# Altium PCB board.PcbDoc
Units mil, origin at the board's own origin, x right, y up, seen from the top; angles counter-clockwise.
Board outline 2160 x 2940 mil, 4 copper layers (Top Layer, GND, PWR, Bottom Layer), stack 64.008 mil thick; 87 components, 61 nets, 299 pads, 4 vias.
Unrouted connection lines stored in the file: 184.
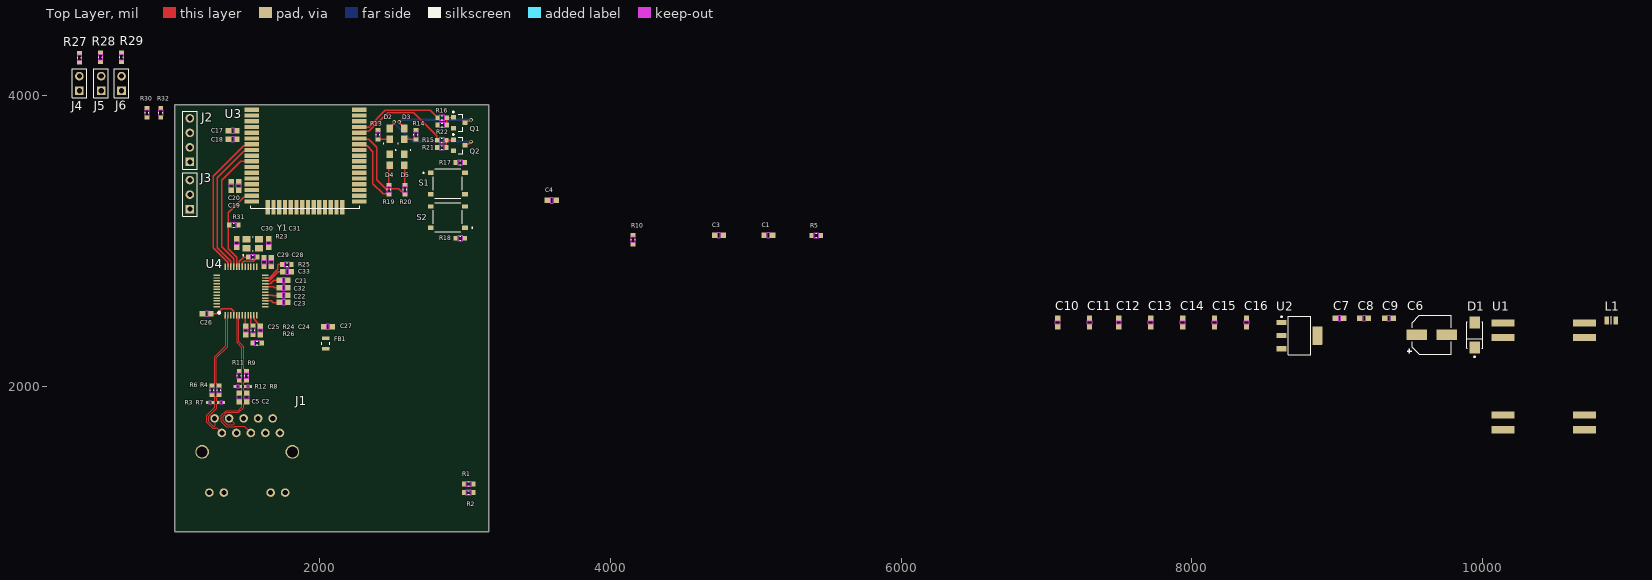
[diagram p0: Top Layer view]
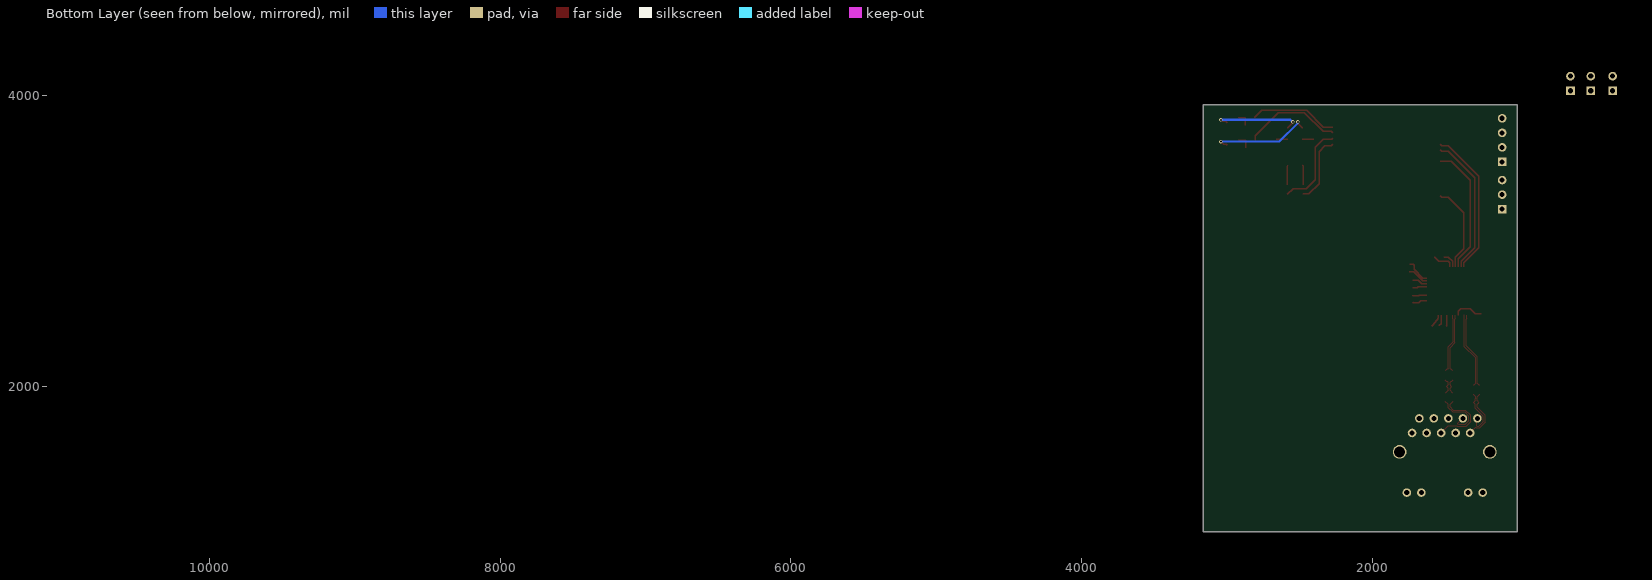
[diagram p1: Bottom Layer view, seen from below]

## Layer stack, top to bottom
Top Solder: solder mask 0.4, Solder Resist, Dk 3.8
Top Layer: signal copper 1.378
Dielectric 2: prepreg 8.2835, PP-006, Dk 4.1
GND: signal copper 1.378
Dielectric 1: dielectric 41.9291, FR-4, Dk 4.8
PWR: signal copper 1.378
Dielectric 3: prepreg 8.2835, PP-006, Dk 4.1
Bottom Layer: signal copper 1.378
Bottom Solder: solder mask 0.4, Solder Resist, Dk 3.8

## Board outline
1000,1000 3160,1000 3160,3940 1000,3940

## Design rules (kind name [scope] priority, off if disabled: settings)
Clearance [All] p1: gap=10 ignorepadtopadclearanceinfootprint=FALSE except(0: Arc-Hole Track-Hole SMDPad-Hole THPad-Hole Via-Hole Fill-Hole Poly-Hole Region-Hole Text-Hole; 5: Arc-Arc Arc-Track Track-Track SMDPad-SMDPad; 7.87: Arc-SMDPad Track-SMDPad SMDPad-Fill SMDPad-Poly SMDPad-Region)
DiffPairsRouting Ethernet [InDifferentialPairClass('Ethernet')] p1: maxlimit=10 minlimit=6 mostfreqgap=6 toplayer_minwidth=7.07 toplayer_maxwidth=7.07 toplayer_prefwidth=7.07 midlayer1_minwidth=7.07 midlayer1_maxwidth=7.07 midlayer1_prefwidth=7.07 midlayer2_minwidth=7.07 midlayer2_maxwidth=7.07 midlayer2_prefwidth=7.07 bottomlayer_minwidth=7.07 bottomlayer_maxwidth=7.07 bottomlayer_prefwidth=7.07 maxuncoupledlength=500
DiffPairsRouting [All] p2: maxlimit=10 minlimit=10 mostfreqgap=10 toplayer_minwidth=8 toplayer_maxwidth=15 toplayer_prefwidth=15 midlayer1_minwidth=8 midlayer1_maxwidth=15 midlayer1_prefwidth=15 midlayer2_minwidth=8 midlayer2_maxwidth=15 midlayer2_prefwidth=15 bottomlayer_minwidth=8 bottomlayer_maxwidth=15 bottomlayer_prefwidth=15 maxuncoupledlength=500
PolygonConnect [All] p1: connectstyle=Relief reliefconductorwidth=10 reliefentries=4 polygonreliefangle="90 Angle" airgapwidth=10
RoomDefinition U_ethernet_PoE [InComponentClass('U_ethernet_PoE')] p1: confinementstyle=ConfineIn formatcopy=TRUE lockcomponents=FALSE outline 7045,1630 10950,1630 10950,2600 7045,2600
RoutingVias [All] p1: holewidth=19.68 width=39.37 viastyle="Through Hole" minholewidth=7.87 minwidth=23.62 maxholewidth=28 maxwidth=50
SilkToSolderMaskClearance [IsPad] p1: minsilkscreentomaskgap=5.91 clearancetoexposedcopper=TRUE
SolderMaskExpansion [All] p1: expansion=4 istentingtop=FALSE
Width [All] p1: maxlimit=15 minlimit=4 preferedwidth=10 midlayer1_minwidth=10 midlayer1_maxwidth=10 midlayer2_minwidth=10 midlayer2_maxwidth=10 minimp=50.000000 maximp=50.000000 favimp=50.000000
28 further rules are at their usual default settings.

## Classes and differential pairs
differential pair class Ethernet: __RD RD RX TD TX
component class U_uwb_module: 40 C17 C18 C19 C20 D2 D3 D4 D5 Q1 Q2 R13 R14 R15 R16 R17 R18 R19 R20 R21 R22 S1 S2 U3
component class U_ethernet_W5500: C21 C22 C23 C24 C25 C26 C27 C28 C29 C30 C31 C32 C33 FB1 J4 J5 J6 R23 R24 R25 R26 R27 R28 R29 R30 R31 R32 U4 Y1
component class U_ethernet_RJ45: C1 C2 C3 C4 C5 J1 R1 R2 R3 R4 R5 R6 R7 R8 R9 R10 R11 R12
component class U_ethernet_PoE: C6 C7 C8 C9 C10 C11 C12 C13 C14 C15 C16 D1 L1 U1 U2
component class main: J2 J3
differential pair TX: +TX_P -TX_N
differential pair TD: +TD_P -TD_N
differential pair RX: +RX_P -RX_N
differential pair RD: +RD_P -RD_N
differential pair __RD: +__RD_P -__RD_N

## Components (designator, comment, footprint, x,y, rotation, side; value= is the part's Value field where it differs from the comment)
C1 "Capacitor - Nonpolarized" "0603 - Capacitor" 5085,3040 r0 top value=22nF
C2 "Capacitor - Nonpolarized" "0603 - Capacitor" 1495,1924.84 r270 top value=6.8nF
C3 "Capacitor - Nonpolarized" "0603 - Capacitor" 4745,3040 r0 top value=1nF/2kV
C4 "Capacitor - Nonpolarized" "0603 - Capacitor" 3595,3280 r0 top value=10nF
C5 "Capacitor - Nonpolarized" "0603 - Capacitor" 1445,1924.84 r270 top value=6.8nF
C6 "Capacitor - Polarized" "OCVZ0606 - CAPACITOR" 9650,2355 r0 top value=100uF
C7 "Capacitor - Nonpolarized" "0603 - Capacitor" 9015,2470 r0 top value=10uF
C8 "Capacitor - Nonpolarized" "0603 - Capacitor" 9185,2470 r0 top value=10uF
C9 "Capacitor - Nonpolarized" "0603 - Capacitor" 9355,2470 r0 top value=10uF
C10 "Capacitor - Nonpolarized" "0603 - Capacitor" 7075,2440 r90 top value=0.1uF
C11 "Capacitor - Nonpolarized" "0603 - Capacitor" 7295,2440 r90 top value=DNP
C12 "Capacitor - Nonpolarized" "0603 - Capacitor" 7495,2440 r90 top value=0.1uF
C13 "Capacitor - Nonpolarized" "0603 - Capacitor" 7715,2440 r90 top value=1uF
C14 "Capacitor - Nonpolarized" "0603 - Capacitor" 7935,2440 r90 top value=DNP
C15 "Capacitor - Nonpolarized" "0603 - Capacitor" 8155,2440 r90 top value=DNP
C16 "Capacitor - Nonpolarized" "0603 - Capacitor" 8375,2440 r90 top value=DNP
C17 "Capacitor - Nonpolarized" "0603 - Capacitor" 1399.84,3760 r0 top value=330pF
C18 "Capacitor - Nonpolarized" "0603 - Capacitor" 1399.84,3700 r180 top value=330pF
C19 "Capacitor - Nonpolarized" "0603 - Capacitor" 1440,3380 r270 top value=10uF
C20 "Capacitor - Nonpolarized" "0603 - Capacitor" 1390,3380 r270 top value=100nF
C21 "Capacitor - Nonpolarized" "0603 - Capacitor" 1750.16,2731.6 r180 top value=0.1uF
C22 "Capacitor - Nonpolarized" "0603 - Capacitor" 1750.16,2626.94 r180 top value=0.1uF
C23 "Capacitor - Nonpolarized" "0603 - Capacitor" 1750.16,2578.88 r180 top value=0.1uF
C24 "Capacitor - Nonpolarized" "0603 - Capacitor" 1590,2385.16 r90 top value=0.1uF
C25 "Capacitor - Nonpolarized" "0603 - Capacitor" 1490,2385.16 r90 top value=0.1uF
C26 "Capacitor - Nonpolarized" "0603 - Capacitor" 1220.47,2500 r0 top value=0.1uF
C27 "Capacitor - Nonpolarized" "0603 - Capacitor" 2055,2410 r180 top value=10uF
C28 "Capacitor - Nonpolarized" "0603 - Capacitor" 1665,2854.84 r270 top value=10uF
C29 "Capacitor - Nonpolarized" "0603 - Capacitor" 1615,2854.84 r270 top value=0.1uF
C30 "Capacitor - Nonpolarized" "0603 - Capacitor" 1426.69,2987.4 r270 top value=10pF
C31 "Capacitor - Nonpolarized" "0603 - Capacitor" 1646.69,2987.4 r90 top value=10pF
C32 "Capacitor - Nonpolarized" "0603 - Capacitor" 1750.16,2680 r180 top value=4.7uF
C33 "Capacitor - Nonpolarized" "0603 - Capacitor" 1775,2790 r180 top value=10nF
D1 "SMAJ58A" FP-SMAJ-MFG 9945,2355 r90 top
D2 "LED" "0805 - DIODE" 2479.3,3737.51 r90 top
D3 "LED" "0805 - DIODE" 2579.65,3737.51 r90 top
D4 "LED" "0805 - DIODE" 2479.3,3560 r270 top
D5 "LED" "0805 - DIODE" 2579.65,3560 r270 top
FB1 "120 @ 100MHz" FP-BLM21-0_2-t0_85-e0_5-MFG 2040,2295 r90 top
J1 "MAGJACK-POE" ARJP11A-MASA-B-A-EMU2 1500,1430 r0 top
J2 "1x4 Header" HDR1X4 1105,3545 r90 top
J3 "1x3 Header" HDR1X3 1105,3220 r90 top
J4 "1x2 Header" HDR1X2 345,4035 r90 top
J5 "1x2 Header" HDR1X2 495,4035 r90 top
J6 "1x2 Header" HDR1X2 635,4035 r90 top
L1 "DNP" FP-DFE21CC_EL-MFG 10885,2455 r0 top
Q1 "MGSF2N02ELT1G" ONSC-SOT-23-3-318-08_V 2957.79,3813.97 r0 top
Q2 "MGSF2N02ELT1G" ONSC-SOT-23-3-318-08_V 2957.79,3658.97 r0 top
R1 "Resistor" "0603 - Resistor" 3022.52,1330 r0 top value=1k
R2 "Resistor" "0603 - Resistor" 3022.48,1270 r0 top value=1k
R3 "Resistor" "0402 - Resistor" 1320,1890 r180 top value=49.9
R4 "Resistor" "0603 - Resistor" 1305,1975 r270 top value=33
R5 "Resistor" "0603 - Resistor" 5415,3040 r0 top value=10
R6 "Resistor" "0603 - Resistor" 1258.03,1975.16 r270 top value=33
R7 "Resistor" "0402 - Resistor" 1245,1890 r180 top value=49.9
R8 "Resistor" "0402 - Resistor" 1505,1999.84 r180 top value=49.9
R9 "Resistor" "0603 - Resistor" 1495,2074.84 r270 top value=33
R10 "Resistor" "0603 - Resistor" 4155,3010 r90 top value=0
R11 "Resistor" "0603 - Resistor" 1445,2074.84 r270 top value=33
R12 "Resistor" "0402 - Resistor" 1435,1999.84 r180 top value=49.9
R13 "Resistor" "0603 - Resistor" 2400,3732.48 r90 top value=1k
R14 "Resistor" "0603 - Resistor" 2660,3732.48 r90 top value=1k
R15 "Resistor" "0603 - Resistor" 2837.16,3693.97 r180 top value=1k
R16 "Resistor" "0603 - Resistor" 2840.27,3848.97 r180 top value=1k
R17 "Resistor" "0603 - Resistor" 2965,3540 r180 top value=DNP
R18 "Resistor" "0603 - Resistor" 2965,3020 r180 top value=DNP
R19 "Resistor" "0603 - Resistor" 2475,3355 r90 top value=1k
R20 "Resistor" "0603 - Resistor" 2585,3355 r90 top value=1k
R21 "Resistor" "0603 - Resistor" 2837.16,3643.97 r0 top value=100k
R22 "Resistor" "0603 - Resistor" 2840.31,3798.97 r0 top value=100k
R23 "Resistor" "0603 - Resistor" 1536.69,2891.5 r180 top value=1M
R24 "Resistor" "0603 - Resistor" 1540,2387.13 r90 top value=10k
R25 "Resistor" "0603 - Resistor" 1773.03,2840 r180 top value=10k
R26 "Resistor" "0603 - Resistor" 1567.48,2300 r180 top value=2.4k
R27 "Resistor" "0603 - Resistor" 345,4262.48 r90 top value=10k
R28 "Resistor" "0603 - Resistor" 490,4265 r90 top value=10k
R29 "Resistor" "0603 - Resistor" 635,4265 r90 top value=10k
R30 "Resistor" "0603 - Resistor" 810,3882.52 r90 top value=10k
R31 "Resistor" "0603 - Resistor" 1407.52,3110 r0 top value=DNP
R32 "Resistor" "0603 - Resistor" 905,3882.52 r90 top value=10k
S1 "TS-1187A-B-A-B" SW_TS-1187A-B-A-B 2880,3396.18 r0 top
S2 "TS-1187A-B-A-B" SW_TS-1187A-B-A-B 2880,3165 r180 top
U1 "POE_PSU-DP990X" Ag9900m 10420,2070 r90 top
U2 "TLV1117LV33DCYR" DCY0004A_N 8740,2350 r0 top
U3 "DWM3001C" DWM3001C 1523.7,3227.91 r0 top
U4 "W5500" W5500 1456.1,2657.68 r0 top
Y1 "25MHz" XTAL_TSX-3225_25.0000MF20P-C0 1536.69,2981.5 r90 top

## Footprints (in the part's own frame and the unit in brackets; to place one, negate y for a bottom-side part, rotate by r counter-clockwise, add the part's x,y. Pads: shape width x height; smd on the part's side, far side on the other; paste and mask are expansions set on the pad)
"0402 - Resistor" [mm] "0402 Chip Resistor - IPC Medium Density"
  rect 0.45x0.55 smd: 1(-0.5,0) 2(0.5,0)
  Top Layer keep-out region: -0.25,0.25 -0.25,-0.25 0.25,-0.25 0.25,0.25
  body extent -0.5,-0.25 0.5,0.25, height 0.35
"0603 - Capacitor" [mm] "0603 Chip Capacitor - IPC Medium Density"
  rect 0.95x0.95 smd: 1(-0.75,0) 2(0.75,0)
  Top Layer keep-out region: -0.25,0.45 -0.25,-0.45 0.25,-0.45 0.25,0.45
  body extent -0.8,-0.4 0.8,0.4, height 0.8
"0603 - Resistor" [mm] "0603 Chip Resistor - IPC Medium Density"
  rect 0.7x0.85 smd: 1(-0.825,0) 2(0.825,0)
  Top Layer keep-out region: -0.45,0.4 -0.45,-0.4 0.45,-0.4 0.45,0.4
  silkscreen extent -0.1,-0.33 0.1,0.33, body extent -0.8,-0.4 0.8,0.4, height 0.45
"0805 - DIODE" [mm] "Diode"
  rect 1.35x1.15 smd: 1(-0.948,-0.009) 2(0.952,-0.009)
  silkscreen extent -1.75,1.02 -1.65,1.12, body extent -1.29,-0.71 1.3,0.69, height 1.2
Ag9900m [mm] "PoE Power Supply Module"
  rect 1.25x4 smd: 1(-9.33,-7.1) 2(-6.79,-7.1) 3(6.79,-7.1) 4(9.33,-7.1) 5(9.33,7.1) 6(6.79,7.1) 7(-6.79,7.1) 8(-9.33,7.1)
  body extent -10.6,-8.59 10.6,8.59, height 13.21
ARJP11A-MASA-B-A-EMU2 [mm] "PoE RJ45 Jack with Magnetics and Rectifier"
  round 1.5 / inner round 0 / far side round 1.5 hole 0.9: 1(-5.715,8.89) 2(-4.445,6.35) 3(-3.175,8.89) 4(-1.905,6.35) 5(-0.635,8.89) 6(0.635,6.35) 7(1.905,8.89) 8(3.175,6.35) 9(4.445,8.89) 10(5.715,6.35) 11(-6.63,-4.06) 12(-4.09,-4.06) 13(4.09,-4.06) 14(6.63,-4.06)
  round 2.4 / inner round 0 / far side round 2.4 hole 1.905: S1(-7.875,3.05) S2(7.875,3.05)
  body extent -10.33,-10.9 10.33,10.69, height 16.04
DCY0004A_N [mm] "SOT223, 4-Leads, Body 6.7x3.7mm, Pitch 2.3mm, IPC Medium Density"
  rrect11% 1.75x0.9 smd: 1(-3.125,2.3) 2(-3.125,0) 3(-3.125,-2.3)
  rrect6% 1.75x3.2 smd: 4(3.125,0)
  silkscreen extent -3.25,-3.35 1.95,3.42, body extent -3.5,-3.25 3.5,3.25, height 1.62
DWM3001C [mm] "DWM3001C"
  rect 2.54x0.75 smd: 1(0.16,17.15) 2(0.16,16.15) 3(0.16,15.15) 4(0.16,14.15) 5(0.16,13.15) 6(0.16,12.15) 7(0.16,11.15) 8(0.16,10.15) 9(0.16,9.15) 10(0.16,8.15) 11(0.16,7.15) 12(0.16,6.15) 13(0.16,5.15) 14(0.16,4.15) 15(0.16,3.15) 16(0.16,2.15) 17(0.16,1.15) 32(18.97,1.15) 33(18.97,2.15) 34(18.97,3.15) 35(18.97,4.15) 36(18.97,5.15) 37(18.97,6.15) 38(18.97,7.15) 39(18.97,8.15) 40(18.97,9.15) 41(18.97,10.15) 42(18.97,11.15) 43(18.97,12.15) 44(18.97,13.15) 45(18.97,14.15) 46(18.97,15.15) 47(18.97,16.15) 48(18.97,17.15)
  rect 0.75x2.54 smd: 18(3,0.16) 19(4,0.16) 20(5,0.16) 21(6,0.16) 22(7,0.16) 23(8,0.16) 24(9,0.16) 25(10,0.16) 26(11,0.16) 27(12,0.16) 28(13,0.16) 29(14,0.16) 30(15,0.16) 31(16,0.16)
  silkscreen extent 0,0 19.1,0.4, body extent 0,0 19.12,35.27, height 4.57
FP-BLM21-0_2-t0_85-e0_5-MFG [mm]
  rect 0.6x1.25 smd paste+0 mask+0: 1(-0.9,0) 2(0.9,0)
  silkscreen extent -0.23,-0.72 0.23,0.72, body extent -1.3,-0.82 1.3,0.82, height 0.25
FP-DFE21CC_EL-MFG [mm]
  rect 0.8x1.4 smd paste+0 mask+0: 1(0.8,0) 2(-0.8,0)
  silkscreen extent 0,-0.7 0,0.7, body extent -1.3,-0.8 1.3,0.8, height 0.25
FP-SMAJ-MFG [mm]
  rect 2.1x1.8 smd paste+0 mask+0: 1(-2.2,0) 2(2.2,0)
  silkscreen extent -3.95,-1.4 2.3,1.4, body extent -3.35,-1.5 3.35,1.5, height 0.25
HDR1X2 [mm] "Connector; Header; 2 Position"
  rect 1.5x1.5 hole 0.9: 1(0,0)
  round 1.5 hole 0.9: 2(2.54,0)
  silkscreen extent -1.27,-1.27 3.81,1.27, body extent -1.27,-1.27 3.81,1.27, height 8.54
HDR1X3 [mm] "Connector; Header; 3 Position"
  rect 1.5x1.5 hole 0.9: 1(0,0)
  round 1.5 hole 0.9: 2(2.54,0) 3(5.08,0)
  silkscreen extent -1.27,-1.27 6.35,1.27, body extent -1.27,-1.27 6.35,1.27, height 8.54
HDR1X4 [mm] "Connector; Header; 4 Position"
  rect 1.5x1.5 hole 0.9: 1(0,0)
  round 1.5 hole 0.9: 2(2.54,0) 3(5.08,0) 4(7.62,0)
  silkscreen extent -1.27,-1.27 8.89,1.27, body extent -1.27,-1.27 8.89,1.27, height 8.54
"OCVZ0606 - CAPACITOR" [mm] "Aluminum Electrolytic Capacitor, Body 6.60x6.60x6.00mm, IPC Low Density"
  rect 3.6x1.85 smd: 1(-2.625,0) 2(2.625,0)
  silkscreen extent -4.3,-3.4 3.4,3.4, body extent -3.6,-3.4 3.6,3.4, height 6
ONSC-SOT-23-3-318-08_V [mm] "SOT23, 3-Leads, Body 2.92x1.3mm, Pitch 0.95mm"
  rect 0.9x0.8 smd: 1(-1,0.95) 2(-1,-0.95) 3(1,0)
  silkscreen extent -1.12,-1.46 0.65,2.02, body extent -0.65,-1.46 0.65,1.46, height 1.11
SW_TS-1187A-B-A-B [mm]
  rect 1x0.75 smd: A(-3,1.875) B(3,1.875) C(-3,-1.875) D(3,-1.875)
  silkscreen extent -4.35,-2.55 2.55,2.55, body extent -3.25,-2.55 3.25,2.55, height 1.55
W5500 [mil] "SPI Ethernet Chip"
  rect 10x45 smd: 1(-108.27,-167.32) 2(-88.58,-167.32) 3(-68.9,-167.32) 4(-49.21,-167.32) 5(-29.53,-167.32) 6(-9.84,-167.32) 7(9.84,-167.32) 8(29.53,-167.32) 9(49.21,-167.32) 10(68.9,-167.32) 11(88.58,-167.32) 12(108.27,-167.32) 25(108.27,167.32) 26(88.58,167.32) 27(68.9,167.32) 28(49.21,167.32) 29(29.53,167.32) 30(9.84,167.32) 31(-9.84,167.32) 32(-29.53,167.32) 33(-49.21,167.32) 34(-68.9,167.32) 35(-88.58,167.32) 36(-108.27,167.32)
  rect 45x10 smd: 13(167.32,-108.27) 14(167.32,-88.58) 15(167.32,-68.9) 16(167.32,-49.21) 17(167.32,-29.53) 18(167.32,-9.84) 19(167.32,9.84) 20(167.32,29.53) 21(167.32,49.21) 22(167.32,68.9) 23(167.32,88.58) 24(167.32,108.27) 37(-167.32,108.27) 38(-167.32,88.58) 39(-167.32,68.9) 40(-167.32,49.21) 41(-167.32,29.53) 42(-167.32,9.84) 43(-167.32,-9.84) 44(-167.32,-29.53) 45(-167.32,-49.21) 46(-167.32,-68.9) 47(-167.32,-88.58) 48(-167.32,-108.27)
  silkscreen extent -163,-163 -137,-137, body extent -177,-177 177,177, height 63
XTAL_TSX-3225_25.0000MF20P-C0 [mm]
  rect 1.15x1.4 smd: 1(-0.8,1.1) 2(-0.8,-1.1) 3(0.8,-1.1) 4(0.8,1.1)
  silkscreen extent -2.1,-0.08 1.25,1.71, body extent -1.25,-1.6 1.25,1.6, height 0.6

## Part data
C1: "Nonpolarized Capacitor", Manufacturer="Samsung Electro-Mechanics", Manufacturer Part Number=CL10B223KB8NNNC, Rating="50V X7R +/-10%", Supplier Part Number=C21122, Supplier=JLCPCB
C2 C5: "Nonpolarized Capacitor", Manufacturer="FH (Guangdong Fenghua Advanced Tech)", Manufacturer Part Number=0603B682K500NT, Rating="50V X7R +/-10%", Supplier Part Number=C1631, Supplier=JLCPCB
C3 C7 C8 C9 C10 C11 C12 C13 C14 C15 C16 C17 C18 C19 C20: "Nonpolarized Capacitor"
C4 C33: "Nonpolarized Capacitor", Manufacturer="FH (Guangdong Fenghua Advanced Tech)", Manufacturer Part Number=0603B103K500NT, Rating="50V X7R +/-10%", Supplier Part Number=C57112, Supplier=JLCPCB
C6: "Polarized Capacitor"
C21 C22 C23 C24 C25 C26 C27 C29: "Nonpolarized Capacitor", Manufacturer=YAGEO, Manufacturer Part Number=CC0603KRX7R9BB104, Rating="50V X7R +/-10%", Supplier Part Number=C14663, Supplier=JLCPCB
C28: "Nonpolarized Capacitor", Manufacturer="Samsung Electro-Mechanics", Manufacturer Part Number=CL10A106KP8NNNC, Rating="10V X5R +/-10%", Supplier Part Number=C19702, Supplier=JLCPCB
C30 C31: "Nonpolarized Capacitor", Manufacturer="Samsung Electro-Mechanics", Manufacturer Part Number=CL10C100JB8NNNC, Rating="50V C0G +/-5%", Supplier Part Number=C1634, Supplier=JLCPCB
C32: "Nonpolarized Capacitor", Manufacturer="Samsung Electro-Mechanics", Manufacturer Part Number=CL10A475KO8NNNC, Rating="16V X5R +/-10%", Supplier Part Number=C19666, Supplier=JLCPCB
D1: library part CMP-08607-000100-1, "TVS DIODE 58V 93.6V DO214AC", Breakdown Voltage=64.4V, Clamping Voltage=93.6V, Current=43A, Leakage Current=1uA, Max Breakdown Voltage=71.2V, Max Operating Temperature=150°C, Max Power Dissipation=3.3W, Max Surge Current=4.3A, Min Operating Temperature=-65°C, Operating Supply Voltage=58V, Package Quantity=5000, Peak Pulse Power=400W, Power Line Protection=No, Test Current=1mA, Composition=Zener, Direction=Unidirectional, Element Configuration=Single, Height=2.087mm, Lead Free="Lead Free", Length=4.5mm, Max Reverse Leakage Current=1uA, Min Breakdown Voltage=64.4V, Mount="Surface Mount", Number of Channels=1, Number of Elements=1, Number of Pins=2, Number of Unidirectional Channels=1, Packaging="Tape and Reel", Peak Pulse Current=4.3A, Polarity=Unidirectional, Power Dissipation=400W, REACH SVHC="No SVHC", Reverse Breakdown Voltage=64.4V, Reverse Standoff Voltage=58V, Termination=SMD/SMT, Voltage=58V, Voltage Rating (DC)=58V, Width=2.79mm
D2 D3 D4 D5: "Light Emitting Diode"
FB1: library part CMP-06046-002573-1, "Chip Ferrite Bead, 0805, 120Ω @ 100MHz, 0.09Ω, 25%, 1A", Case Code (Imperial)=0805, Case Code (Metric)=2012, Current Rating=800mA, DC Resistance (DCR)=100mR, Max DC Current=200mA, Max Operating Temperature=125°C, Min Operating Temperature=-55°C, Package Quantity=4000, Ratings=AEC-Q200, Test Frequency=100MHz, Tolerance=25%, Case/Package=0805, Contact Plating=Tin, Height=0.041inch, Impedance=120R, Length=2mm, Material=Steel, Max Current Rating=800mA, Mount="Surface Mount", Number of Circuits=1, Number of Lines=1, Packaging="Tape and Reel", Series="EMIFIL®, BLM21A", Shielding=Unshielded, Termination=SMD/SMT, Width=1.25mm
J1: library part ARJP11A-MASA-B-A-EMU2, "ARJP11A-MASA-B-A-EMU2", DeviceSetName=MAGJACK-POE, GateName_1=J1, J1=J1, J2=J2, J3=J3, J4,5=J4,5, J6=J6, J7,8=J7,8, LibraryName=SparkFun-Connectors, PROD_ID=CONN-16253, SymbolName_1=MAGJACK_POE_SYMMETRICAL
J2: "1x4 Pin Header"
J3: "1x3 Pin Header"
J4 J5 J6: "1x2 Pin Header"
L1: library part CMP-06042-017091-1, "FIXED IND 2.2UH 2100MA NONAUTO"
Q1 Q2: library part CMP-1058-00775-1, "Power MOSFET, 2.8 A, 20 V, N-Channel, 3-Pin SOT-23, Pb-Free, Tape and Reel", Manufacturer="On Semiconductor", Package Type=SOT-23-3, Channel Polarity="N Channel", Ciss Typ (pF)=150, ComponentLink1Description="Manufacturer URL", ComponentLink1URL=http://www.onsemi.com/, ComponentLink2Description=Datasheet, ComponentLink2URL=http://www.onsemi.cn/pub_link/Collateral/MGSF2N02EL-D.PDF, ComponentLink3Description="Package Specification", ComponentLink3URL=http://www.onsemi.cn/pub_link/Collateral/318-08.PDF, Configuration=Single, Coss Typ (pF)=130, Crss Typ (pF)=45, DatasheetVersion="Rev. 3", ID Max (A)=2.8, Mounting Technology="Surface Mount", PackageDescription="3-Pin Small Outline Transistor, Body 2.92 x 1.3 mm, Pitch 0.95 mm", PackageReference=SOT-23-3-318-08, PackageVersion="Rev. AP, 11/2009", Packing="Tape and Reel", PartNumber=MGSF2N02ELT1G, PD Max (W)=1.25, Qrr Typ (nC)=200, RoHS=Pb-Free, V(BR)DSS Min (V)=20, VGS Max (V)=8, VGS(th) Max (V)=1
R1 R2 R13 R14 R15 R16 R19 R20: Manufacturer="UNI-ROYAL(Uniroyal Elec)", Manufacturer Part Number=0603WAF1001T5E, Rating=100mW, Supplier Part Number=C21190, Supplier=JLCPCB
R3 R7 R8 R12: Manufacturer="UNI-ROYAL(Uniroyal Elec)", Manufacturer Part Number=0402WGF499JTCE, Rating=100mW, Supplier Part Number=C25120, Supplier=JLCPCB
R4 R6 R9 R11: Manufacturer="UNI-ROYAL(Uniroyal Elec)", Manufacturer Part Number=0603WAF330JT5E, Rating=100mW, Supplier Part Number=C23140, Supplier=JLCPCB
R5: Manufacturer="UNI-ROYAL(Uniroyal Elec)", Manufacturer Part Number=0603WAF100JT5E, Rating=100mW, Supplier Part Number=C22859, Supplier=JLCPCB
R10: Manufacturer="UNI-ROYAL(Uniroyal Elec)", Manufacturer Part Number=0603WAF0000T5E, Rating=100mW, Supplier Part Number=C21189, Supplier=JLCPCB
R23: Manufacturer="UNI-ROYAL(Uniroyal Elec)", Manufacturer Part Number=0603WAF1004T5E, Rating=100mW, Supplier Part Number=C22935, Supplier=JLCPCB
R24 R25 R27 R28 R29 R30 R32: Manufacturer="UNI-ROYAL(Uniroyal Elec)", Manufacturer Part Number=0603WAF1002T5E, Rating=100mW, Supplier Part Number=C25804, Supplier=JLCPCB
R26: Manufacturer="UNI-ROYAL(Uniroyal Elec)", Manufacturer Part Number=0603WAF2401T5E, Rating=100mW, Supplier Part Number=C22940, Supplier=JLCPCB
S1 S2: "SPST 50mA @ 12VDC Top Actuated Round Button 160gf SMD Tactile Switches RoHS", Manufacturer="XKB Connectivity", Manufacturer Part Number=TS-1187A-B-A-B, Supplier=JLCPCB, Supplier Part Number=TS-1187A-B-A-B
U1: library part Ag99005M, "Ag99005M", DeviceName=-DP990X, DeviceSetName=POE_PSU, GateName_1=U1, LibraryName=SparkFun-IC-Power, PROD_ID=IC-16251, SymbolName_1=POE_PSU
U2: library part CMP-0395-00503-2, "Single Output LDO, 1 A, Fixed 3.3 V Output, 2 to 5.5 V Input, 4-pin SOT-223 (DCY), -40 to 125 degC, Green (RoHS & no Sb/Br)", Manufacturer="Texas Instruments", Accuracy(%)=2, Code_JEDEC=TO-261, ComponentLink1Description="Manufacturer URL", ComponentLink1URL=http://www.ti.com/, ComponentLink2Description=Datasheet, ComponentLink2URL=http://www.ti.com/general/docs/lit/getliterature.tsp?genericPartNumber=TLV1117LV33&fileType=pdf, ComponentLink3Description="Package Specification", ComponentLink3URL=http://www.ti.com/litv/pdf/mpds094a, DatasheetVersion=SBVS160A, Eco-Plan="Green (RoHS & no Sb/Br)", Fixed Output Options(V)=3.3, Iout(Max)(A)=1, Iq(Typ)(mA)=0.05, Mounting Technology="Surface Mount", PackageDescription="4-Pin Plastic Small Outline, Body 3.5 x 6.5 mm, Pitch 2.3 mm", PackageReference=DCY0004A, PackageVersion=4202506/B, PartNumber=TLV1117LV33DCYR, SubFamily="Single Channel LDO", Vdo(Typ)(mV)=1200, Vin(Max)(V)=5.5, Vin(Min)(V)=2, Vout Adj(Max)(V)=3.3, Vout Adj(Min)(V)=3.3
Y1: library part TSX-3225_25.0000MF20P-C0, "25 MHz Â±10ppm Crystal 18pF 40 Ohms 4-SMD, No Lead", Manufacturer="Yangxing Tech", Manufacturer Part Number=X322525MOB4SI, Supplier=JLCPCB, Supplier Part Number=X322525MOB4SI
U4: DeviceSetName=W5500, GateName_1=U1, LibraryName=SparkFun-IC-Comms, PROD_ID=IC-16240, SymbolName_1=W5500

## Via types
v1: diameter 23.62, hole 13.78, Top Layer to Bottom Layer, 4 vias

## Nets (pads, with @x,y where several pads share a name; then routed paths per layer and width w, separated by ;. In a path a pad name is that pad's centre, name@x,y a point inside that pad or via, vN(x,y) a via of type N, cw(c..) or ccw(c..) an arc to the next point about the centre after c; other vN are vias at no path point)
3.3V: C12.2 C13.2 C14.2 C15.2 C16.2 C19.1 C20.1 C28.2 C29.2 D4.1 D5.1 FB1.1 R1.2 R2.2 R13.2 R14.2 R17.2 R18.2 R27.2 R28.2 R29.2 R30.2 R31.2 R32.2 U2.2 U2.4 U3.12 U4.28
5V: C9.2 C10.2 C11.2 L1.2 U2.3
__RD_N: C5.1 R11.2 R12.1 | length 113
  Top Layer w7.07: C5.1 1463.46,1972.84 1463.46,1989.09 1454.68,1997.87 R12.1 1454.68,2001.81 1463.46,2010.59 1463.46,2027.98 1459.32,2032.12 1455.24,2032.12 R11.2
__RD_P: C2.1 R8.2 R9.2 | length 113
  Top Layer w7.07: C2.1 1476.53,1972.84 1476.53,1989.09 1485.31,1997.87 R8.2 1485.31,2001.81 1476.54,2010.59 1476.54,2027.98 1480.68,2032.12 1484.76,2032.12 R9.2
ACT_LED: J1.14 U4.27
ETH_C\S\: R31.1 U3.16 U4.32 | length 602.8
  Top Layer w10: U4.32 1426.57,2890.47 1370,2947.04 1370,3196.16 1476.64,3302.8 1520.24,3302.8 U3.16
ETH_I\N\T\: R30.1 U3.23 U4.36
ETH_MISO: U3.8 U4.34 | length 963.6
  Top Layer w10: U4.34 1387.2,2862.8 1295,2955 1295,3436.12 1476.64,3617.76 1520.24,3617.76 U3.8
ETH_MOSI: U3.7 U4.35 | length 1019.7
  Top Layer w10: U4.35 1367.52,2852.48 1265,2955 1265,3445.49 1476.64,3657.13 1520.24,3657.13 U3.7
ETH_R\S\T\: R32.1 U3.24 U4.37
ETH_SCLK: U3.10 U4.33 | length 887.3
  Top Layer w10: U4.33 1406.89,2878.11 1325,2960 1325,3420 1453.78,3548.78 U3.10
GND: C1.1 C3.1 C4.1 C6.2 C7.1 C8.1 C9.1 C10.1 C11.1 C12.1 C13.1 C14.1 C15.1 C16.1 C17.2 C18.2 C19.2 C20.2 C21.1 C22.1 C23.1 C24.1 C25.1 C26.1 C27.1 C28.1 C29.1 C30.1 C31.1 C32.1 C33.1 J2.1 J3.1 J4.1 J5.1 J6.1 Q1.2 Q2.2 R21.1 R22.1 R25.1 R26.1 S1.C S1.D S2.C S2.D U1.3 U2.1 U3.1 U3.11 U3.21 U3.38 U3.48 U4.3 U4.9 U4.14 U4.16 U4.19 U4.29 U4.48 Y1.2 Y1.4
ISO-GND: C3.2 J1.7 J1.8 J1.S1
LED0: R20.1 U3.43 | length 603
  Top Layer w10: U3.43 2277.36,3699.45 2335.55,3699.45 2390,3645 2390,3423.76 2452.94,3360.83 2543.74,3360.83 2582.05,3322.52 R20.1
LED1: R19.1 U3.42 | length 476.6
  Top Layer w10: U3.42 2280.32,3657.13 2323.92,3657.13 2365,3616.04 2365,3395 2435,3325 2472.52,3325 R19.1
LINK_LED: J1.12 U4.25
NetC6_1: C6.1 C7.2 C8.2 L1.1 U1.1 U1.2
NetC17_1: C17.1 U3.4
NetC18_1: C18.1 U3.5
NetC30_2: C30.2 R23.2 U4.31 Y1.1 | length 106.7
  Top Layer w10: U4.31 1446.26,2861.26 1475,2890 1502.72,2890 R23.2
NetC31_2: C31.2 R23.1 U4.30 Y1.3 | length 147.7
  Top Layer w10: U4.30 1465.94,2851.02 1475.3,2860.37 1541,2860.37 1569.17,2888.54 R23.1
NetC32_2: C32.2 U4.20 | length 100.2
  Top Layer w10: U4.20 1682.79,2687.21 1690,2680 C32.2
NetC33_2: C33.2 U4.22 | length 148.3
  Top Layer w10: U4.22 1651.58,2726.58 1712.63,2787.63 1743.1,2787.63 C33.2
NetD2_1: D2.1 R13.1 | length 79.7
  Top Layer w10: R13.1 2479.45,3700 D2.1
NetD2_2: D2.2 Q2.3 | length 700.9
  Top Layer w10: D2.2 2479.65,3778.94 2507.39,3806.68 2507.39,3817.39 v1(2510,3820) ; Q2.3 3004.63,3666.44 3021.44,3666.44 v1(3040,3685)
  Bottom Layer w15: v1(2510,3820) 2511.65,3818.35 2511.65,3811.9 2638.55,3685 v1(3040,3685)
NetD3_1: D3.1 R14.1 | length 80.1
  Top Layer w10: D3.1 2580.2,3700 R14.1
NetD3_2: D3.2 Q1.3 | length 612.3
  Top Layer w10: v1(2545,3820) 2547.61,3817.39 2547.61,3811.33 2580,3778.94 D3.2 ; Q1.3 3007.91,3824.72 3026.03,3824.72 3036.31,3835 v1(3040,3835)
  Bottom Layer w15: v1(2545,3820) 2547.33,3820 2562.33,3835 v1(3040,3835)
NetD4_2: D4.2 R19.2 | length 136.7
  Top Layer w10: R19.2 2475,3518.56 D4.2
NetD5_2: D5.2 R20.2 | length 137.4
  Top Layer w10: D5.2 2585,3516.81 R20.2
NetJ1_11: J1.11 R1.1
NetJ1_13: J1.13 R2.1
NetJ2_2: J2.2 U3.3
NetJ2_3: J2.3 U3.2
NetJ3_2: J3.2 U3.32
NetJ3_3: J3.3 U3.34
NetQ1_1: Q1.1 R16.1 R22.2 | length 96.7
  Top Layer w10: R22.2 R16.1 2916.02,3848.97 Q1.1
NetQ2_1: Q2.1 R15.1 R21.2 | length 99.8
  Top Layer w10: R21.2 R15.1 2916.02,3693.97 Q2.1
NetR8_1: R8.1 R10.1 R12.2
NetR24_1: R24.1 R26.2
NetR24_2: R24.2 U4.10 | length 78.7
  Top Layer w10: U4.10 1525,2431.65 1537.05,2419.61 R24.2
NetR25_2: R25.2 U4.23 | length 172.3
  Top Layer w10: U4.23 1650.05,2746.26 1710,2806.21 1710,2834.14 1715.86,2840 R25.2
PMODE0: J4.2 R27.1 U4.45
PMODE1: J5.2 R28.1 U4.44
PMODE2: J6.2 R29.1 U4.43
PWR+: D1.1 J1.9 U1.5 U1.6
PWR-: D1.2 J1.10 U1.7 U1.8
R\E\S\E\T\: J2.4 R17.1 S1.A S1.B U3.47
RCT: C4.2 J1.5 R10.2
RD_N: C5.2 J1.6 | length 490.6
  Top Layer w7.07: C5.2 1463.46,1876.85 1463.46,1860.24 1437.4,1834.18 1353.93,1834.18 1321.8,1802.04 1321.8,1757.96 1356.69,1723.07 1410.14,1723.07 1413.13,1726.05 1478.95,1726.05 J1.6
RD_P: C2.2 J1.3 | length 387.9
  Top Layer w7.07: J1.3 1408.87,1746.13 1408.87,1740.28 1404.72,1736.13 1362.11,1736.13 1334.87,1763.38 1334.87,1796.62 1359.35,1821.11 1442.81,1821.11 1476.54,1854.83 1476.54,1876.85 C2.2
RX_LED: R16.2 U3.45 | length 607.7
  Top Layer w10: U3.45 2335,3785 2450,3900 2759.72,3900 2807.79,3851.92 R16.2
RX_N: R11.1 U4.5 | length 408.4
  Top Layer w7.07: U4.5 1428.04,2488.89 1428.04,2464.95 1429.88,2463.11 1429.88,2300.59 1463.46,2267.01 1463.46,2121.71 1459.32,2117.57 1455.24,2117.57 R11.1
RX_P: R9.1 U4.6 | length 408.4
  Top Layer w7.07: U4.6 1444.8,2488.89 1444.8,2464.95 1442.95,2463.11 1442.95,2306.01 1476.54,2272.42 1476.54,2121.71 1480.68,2117.57 1484.76,2117.57 R9.1
TCT: C1.2 J1.4 R5.2
TD_N: J1.2 R6.2 R7.1 | length 369.3
  Top Layer w7.07: R6.2 1260.98,1942.68 1274.95,1928.71 1274.95,1912.72 1275.96,1911.7 1275.96,1901.43 1271.82,1897.29 1270.01,1897.29 1264.68,1891.97 R7.1 1264.68,1888.03 1270.01,1882.71 1271.82,1882.71 1275.96,1878.57 1275.96,1856.21 1221.8,1802.04 1221.8,1753.07 1263.79,1711.07 1280.48,1711.07 1284.27,1714.87 1290.13,1714.87 J1.2
TD_P: J1.1 R3.2 R4.2 | length 340.9
  Top Layer w7.07: J1.1 1279.2,1775.8 1279.2,1728.29 1275.06,1724.14 1269.2,1724.14 1234.87,1758.48 1234.87,1796.62 1289.03,1850.79 1289.03,1878.57 1293.18,1882.71 1294.99,1882.71 1300.31,1888.03 R3.2 1300.31,1891.97 1294.99,1897.29 1293.18,1897.29 1289.03,1901.43 1289.03,1917.12 1288.02,1918.14 1288.02,1928.49 1302.05,1942.52 R4.2
TX_LED: R15.2 U3.44 | length 689.3
  Top Layer w10: U3.44 2280.32,3755.39 2335.39,3755.39 2465,3885 2645,3885 2804.68,3725.32 R15.2
TX_N: R6.1 U4.1 | length 524.4
  Top Layer w7.07: R6.1 1260.98,2007.64 1275.01,2021.67 1275.01,2203.84 1351.14,2279.97 1351.14,2463.11 1349.3,2464.95 1349.3,2488.89 U4.1
TX_P: R4.1 U4.2 | length 524.5
  Top Layer w7.07: R4.1 1302.05,2007.48 1288.08,2021.44 1288.08,2198.43 1364.21,2274.56 1364.21,2463.11 1366.06,2464.95 1366.06,2488.89 U4.2
USER_BUTTON: R18.1 S2.A S2.B U3.46
VCCA: C21.2 C22.2 C23.2 C24.2 C25.2 C26.2 C27.2 FB1.2 R3.1 R5.1 R7.2 U4.4 U4.8 U4.11 U4.15 U4.17 U4.21 | length 688.3
  Top Layer w10: C26.2 1290,2500 1325,2535 1388.27,2535 1406.89,2516.38 U4.4 ; U4.8 1485.63,2419.05 C25.2 ; U4.11 1544.68,2470.32 1546.5,2468.5 1546.5,2462.53 1576.3,2432.72 1576.3,2428.39 C24.2 ; U4.15 1666.22,2588.78 1680,2575 1716.75,2575 C23.2 ; U4.17 1676.85,2628.15 1680,2625 1718.69,2625 C22.2 ; U4.21 1656.89,2706.89 1681.6,2731.6 C21.2
pads on no net: J1.S2 U1.4 U3.6 U3.9 U3.13 U3.14 U3.15 U3.17 U3.18 U3.19 U3.20 U3.22 U3.25 U3.26 U3.27 U3.28 U3.29 U3.30 U3.31 U3.33 U3.35 U3.36 U3.37 U3.39 U3.40 U3.41 U4.7 U4.12 U4.13 U4.18 U4.24 U4.26 U4.38 U4.39 U4.40 U4.41 U4.42 U4.46 U4.47